# Altium PCB I2C-Sensor-PCB-Backup.pcbdoc
Units mil, origin at the board's own origin, x right, y up, seen from the top; angles counter-clockwise.
Board outline 1140 x 940 mil, 2 copper layers (Top Layer, Bottom Layer), stack 62.2 mil thick; 9 components, 4 nets, 25 pads, 4 vias.
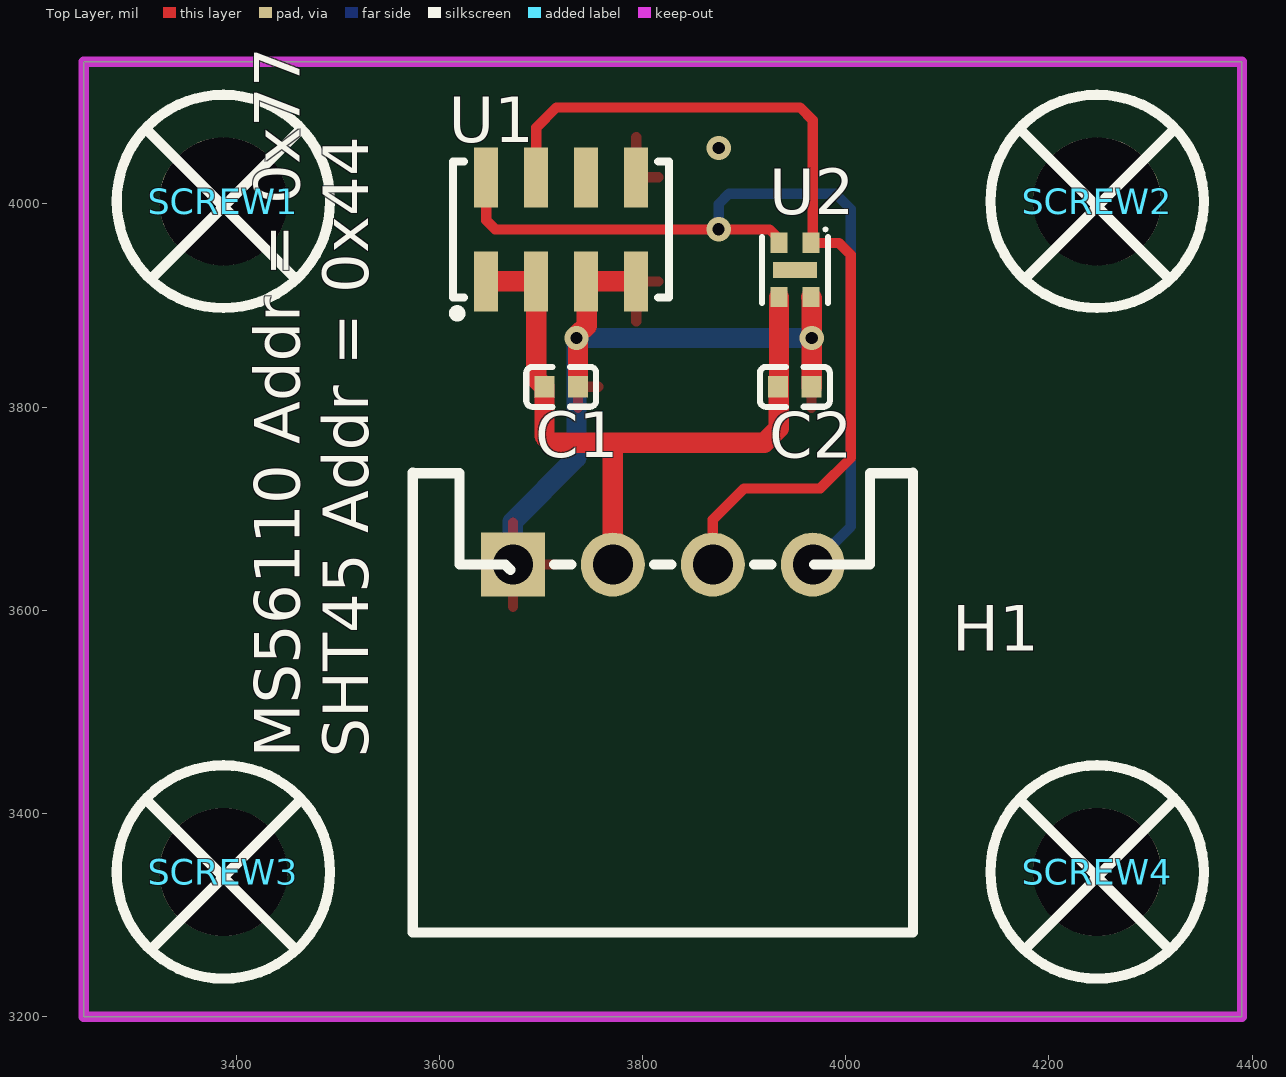
[diagram p0: Top Layer view]
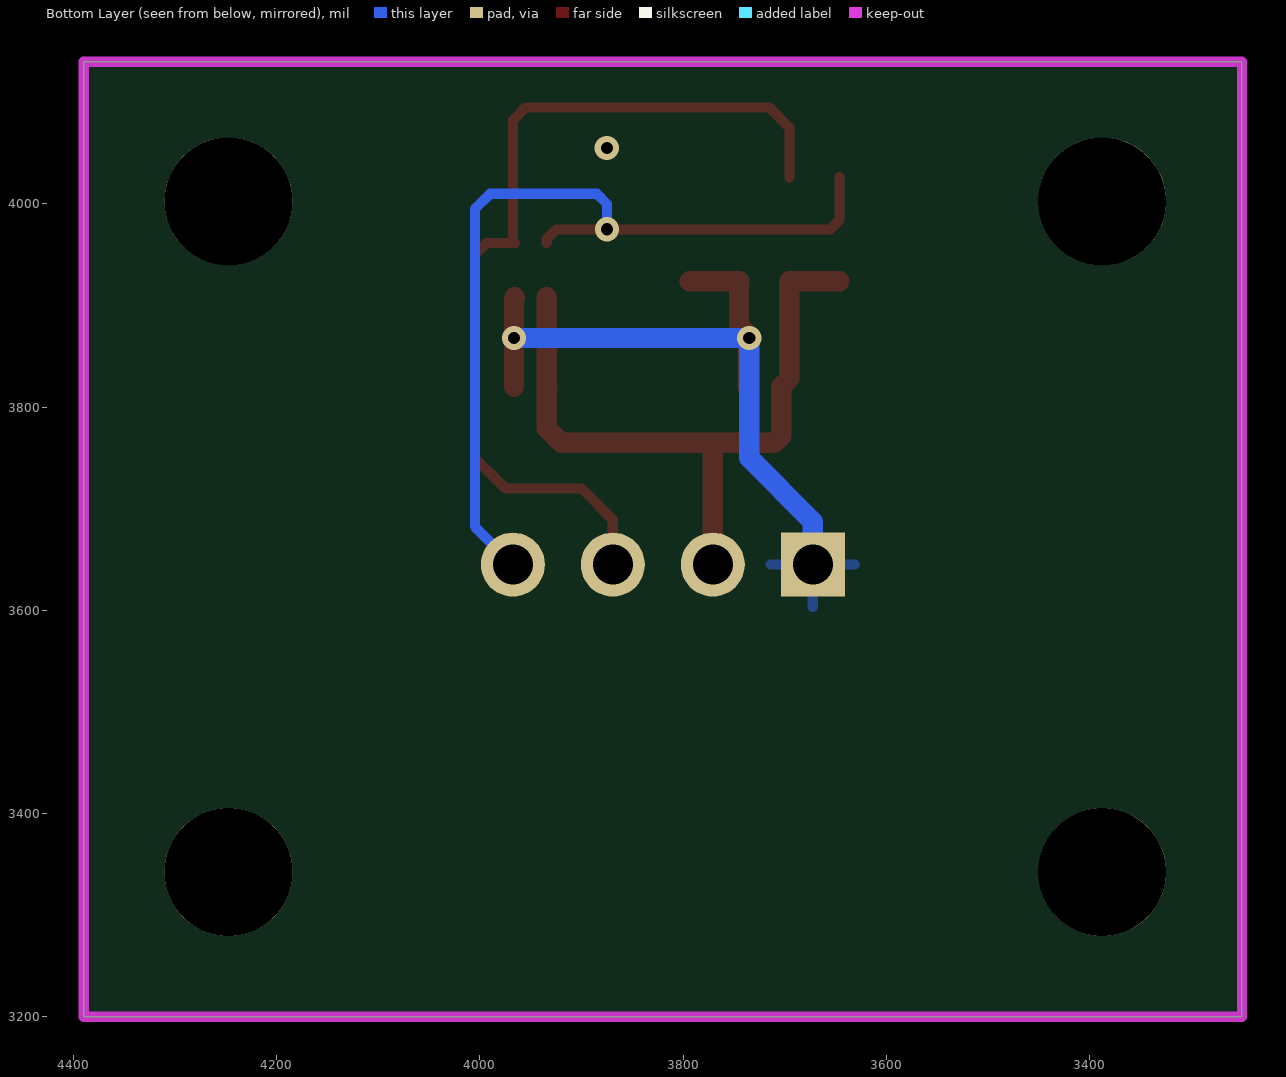
[diagram p1: Bottom Layer view, seen from below]

## Layer stack, top to bottom
Top Solder Mask Layer: solder mask 0.4, Dk 3.3
Top Layer: signal copper 1.4
Dielectric1: surface 59.4, FR4, Dk 4.5
Bottom Layer: signal copper 1.4
Bottom Solder Mask Layer: solder mask 0.4, Dk 3.3

## Board outline
3250,4140 3250,3200 4390,3200 4390,4140

## Design rules (kind name [scope] priority, off if disabled: settings)
BoardOutlineClearance copperThickness1oz [All] p0: genericclearance=10 ignorepadtopadclearanceinfootprint=FALSE except(0: Arc-SplitContinuation Track-SplitContinuation SMDPad-SplitContinuation THPad-SplitContinuation Via-SplitContinuation Fill-SplitContinuation Poly-SplitContinuation Region-SplitContinuation Text-SplitContinuation)
BoardOutlineClearance copperThickness2oz [All] p0: genericclearance=10 ignorepadtopadclearanceinfootprint=FALSE except(0: Arc-SplitContinuation Track-SplitContinuation SMDPad-SplitContinuation THPad-SplitContinuation Via-SplitContinuation Fill-SplitContinuation Poly-SplitContinuation Region-SplitContinuation Text-SplitContinuation)
BoardOutlineClearance Plane_innerPlane [All] p0: genericclearance=10 ignorepadtopadclearanceinfootprint=FALSE except(0: Arc-SplitContinuation Track-SplitContinuation SMDPad-SplitContinuation THPad-SplitContinuation Via-SplitContinuation Fill-SplitContinuation Poly-SplitContinuation Region-SplitContinuation Text-SplitContinuation)
BoardOutlineClearance Copper_copperRegion [All] p0: genericclearance=10 ignorepadtopadclearanceinfootprint=FALSE except(0: Arc-SplitContinuation Track-SplitContinuation SMDPad-SplitContinuation THPad-SplitContinuation Via-SplitContinuation Fill-SplitContinuation Poly-SplitContinuation Region-SplitContinuation Text-SplitContinuation)
BoardOutlineClearance otherClearance [All] p0: genericclearance=10 ignorepadtopadclearanceinfootprint=FALSE except(0: Arc-SplitContinuation Track-SplitContinuation SMDPad-SplitContinuation THPad-SplitContinuation Via-SplitContinuation Fill-SplitContinuation Poly-SplitContinuation Region-SplitContinuation Text-SplitContinuation)
Clearance copperThickness1oz [All] p1: gap=7 ignorepadtopadclearanceinfootprint=FALSE
Clearance copperThickness2oz [All] p1: gap=7 ignorepadtopadclearanceinfootprint=FALSE
Clearance Plane_innerPlane [All] p1: gap=7 ignorepadtopadclearanceinfootprint=FALSE
Clearance Copper_copperRegion [All] p1: gap=7 ignorepadtopadclearanceinfootprint=FALSE
Clearance otherClearance [All] p1: gap=7 ignorepadtopadclearanceinfootprint=FALSE
DiffPairsRouting differentialPair [All] p1: maxuncoupledlength=10 minlimit=6 maxlimit=Infinity mostfreqgap=6 toplayer_minwidth=10 toplayer_prefwidth=10 toplayer_maxwidth=100 bottomlayer_minwidth=10 bottomlayer_prefwidth=10 bottomlayer_maxwidth=100
PasteMaskExpansion pasteMaskExpansion [All] p1: expansion=0
PlaneConnect innerPlane [All] p1: planeconnectstyle=Relief reliefexpansion=20 reliefentries=4 reliefconductorwidth=10 reliefairgap=10
PolygonConnect copperRegion [All] p1: connectstyle=Relief reliefentries=4 reliefconductorwidth=10 polygonreliefangle="90 Angle" airgapwidth=10
RoutingVias viaSize [All] p1: viastyle="Through Hole" holewidth=12.0078 minholewidth=11.811 maxholewidth=248.0314 width=12.0078 minwidth=11.811 maxwidth=248.0314
SolderMaskExpansion solderMaskExpansion [IsVia] p1: useseparateexpansions=TRUE expansion=-1000 expansionbottom=-1000
SolderMaskExpansion solderMaskExpansion [All] p2: useseparateexpansions=TRUE expansion=2 expansionbottom=2
Width copperThickness1oz [All] p1: maxlimit=100 minlimit=10 preferedwidth=10
Width copperThickness2oz [All] p1: maxlimit=100 minlimit=8 preferedwidth=10

## Components (designator, comment, footprint, x,y, rotation, side; value= is the part's Value field where it differs from the comment)
C1 "100nF" C0402 3720,3820 r0 top
C2 "100nF" C0402 3950,3820 r0 top
H1 "S4B-XH-A(LF)(SN)" CONN-TH_S4B-XH-A-LF-SN 3820,3645 r180 top
SCREW1 "" Screw-Hole-M3 3390,4000 r0 top
SCREW2 "" Screw-Hole-M3 4250,4000 r0 top
SCREW3 "" Screw-Hole-M3 3390,3340 r0 top
SCREW4 "" Screw-Hole-M3 4250,3340 r0 top
U1 "MS561101BA03-50" SENSORS-SMD_MS5611-01BA03 3720,3975 r0 top
U2 "SHT45-AD1F-R2" DFN-4_L1.5-W1.5-P0.8-TL-EP 3950,3935 r270 top

## Footprints (in the part's own frame and the unit in brackets; to place one, negate y for a bottom-side part, rotate by r counter-clockwise, add the part's x,y. Pads: shape width x height; smd on the part's side, far side on the other; paste and mask are expansions set on the pad)
C0402 [mil]
  rect 19.7x21.3 smd: 1(-16.5,0) 2(16.5,0)
  silkscreen extent -34,-20 34,20
CONN-TH_S4B-XH-A-LF-SN [mil]
  rect 63x63 hole 39.4: 1(147.6,0)
  round 63 hole 39.4: 2(49.2,0) 3(-49.2,0) 4(-147.6,0)
  silkscreen extent -246,-91 246,362
DFN-4_L1.5-W1.5-P0.8-TL-EP [mil]
  rect 19.9x16.5 smd: 1(-26.7,15.8) 2(-26.7,-15.7) 3(26.7,-15.7) 4(26.7,15.8)
  rect 15.7x43.3 smd: 5(0,0)
  silkscreen extent -41,-33 33,33
Screw-Hole-M3 [mil]
  round 126 hole 126 paste+0 mask+4: 1(-2.5,2.5)
  silkscreen extent -108,-102 102,108
SENSORS-SMD_MS5611-01BA03 [mil]
  rect 23.6x59.1 smd: 1(-73.8,-51.2) 2(-24.6,-51.2) 3(24.6,-51.2) 4(73.8,-51.2) 5(73.8,51.2) 6(24.6,51.2) 7(-24.6,51.2) 8(-73.8,51.2)
  silkscreen extent -106,-86 106,67

## Via types
v1: diameter 24, hole 12, Top Layer to Bottom Layer, 4 vias

## Nets (pads, with @x,y where several pads share a name; then routed paths per layer and width w, separated by ;. In a path a pad name is that pad's centre, name@x,y a point inside that pad or via, vN(x,y) a via of type N, cw(c..) or ccw(c..) an arc to the next point about the centre after c; other vN are vias at no path point)
GND: C1.2 C2.2 H1.1 U1.3 U1.4 U1.5 U2.4 | length 725.8
  Top Layer w20: C1.2 3736.5,3871.5 3745,3880 3745,3923.4 U1.3 U1.4 ; U2.4 3966.5,3907.5 v1(3966.5,3868.1) C2.2
  Bottom Layer w20: H1.1 3672.4,3687.4 3735,3750 v1(3735,3868.1) v1(3966.5,3868.1)
  other v1: 3875,4055
SCL: H1.4 U1.8 U2.2 | length 872.9
  Top Layer w10: U1.8 3646.2,3983.8 3655,3975 v1(3874.9,3975) 3925,3975 3934.3,3965.8 U2.2
  Bottom Layer w10: v1(3874.9,3975) 3875,3975.1 3875,4000 3885,4010 3990,4010 4005,3995 4005,3682.4 H1.4
SDA: H1.3 U1.7 U2.1 | length 905.1
  Top Layer w10: U1.7 3695.4,4075 3715.4,4095 3955,4095 3967.5,4082.5 3967.5,3963.4 U2.1 3993.3,3961.7 4005,3950 4005,3750 3975,3720 3900,3720 3869.2,3689.2 H1.3
VCC: C1.1 C2.1 H1.2 U1.1 U1.2 U2.3 | length 694.2
  Top Layer w20: U1.1 U1.2 3695.4,3828.1 C1.1 3703.5,3771.5 3710,3765 3772,3765 ; H1.2 3770.8,3763.8 3772,3765 ; U2.3 3934.3,3820.8 C2.1 3934.1,3819.3 3934.1,3779.1 3920,3765 3772,3765
pads on no net: SCREW1.1 SCREW2.1 SCREW3.1 SCREW4.1 U1.6 U2.5

## Polygon pours and split planes (outlines as drawn)
GND on Top Layer (solid, remove dead copper, pour order 0): 3125,4245 3125,3065 4580,3065 4580,4245
GND on Bottom Layer (solid, remove dead copper, pour order 2): 3000,4280 3000,3000 4455,3000 4455,4280

## Keep-outs
Board Outline Layer:
  the board outline again, w10

## Silkscreen, mask and mechanical layers (free items; w line width, h text height)
Top Silkscreen Layer:
  text "MS56110 Addr = 0x77 / SHT45 Addr = 0x44" at 3530,3455 h45 r90